# Altium PCB wch554e.PcbDoc
Units mm, origin at the board's own origin, x right, y up, seen from the top; angles counter-clockwise.
Board outline 19.85 x 16 mm, 2 copper layers (Top Layer, Bottom Layer), stack 0.95 mm thick; 19 components, 15 nets, 57 pads, 13 vias.
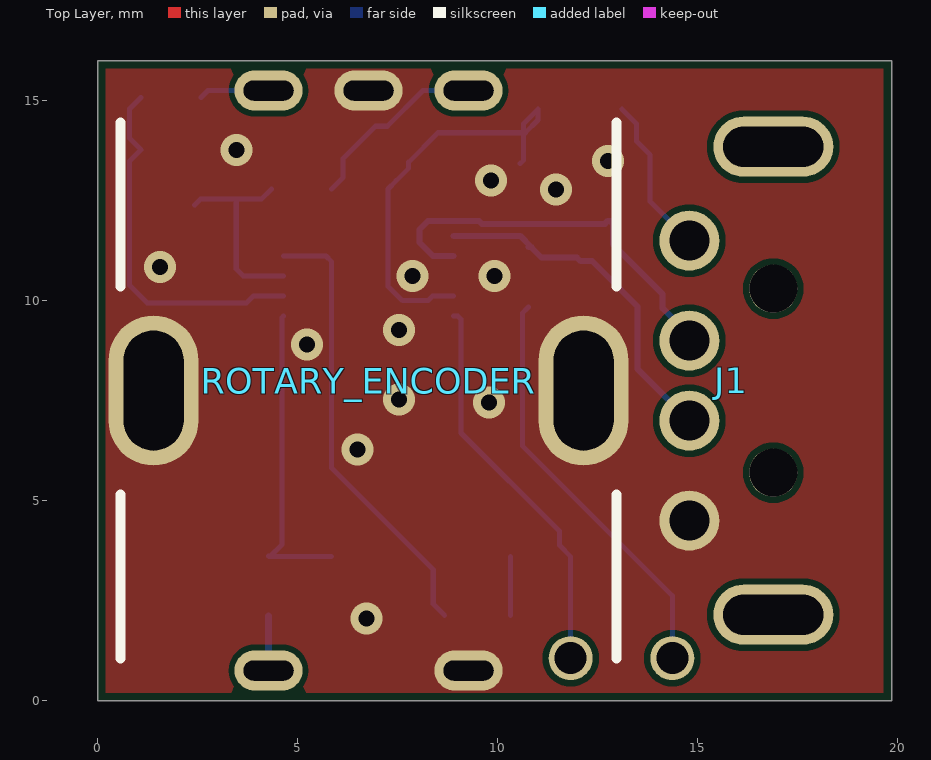
[diagram p0: Top Layer view]
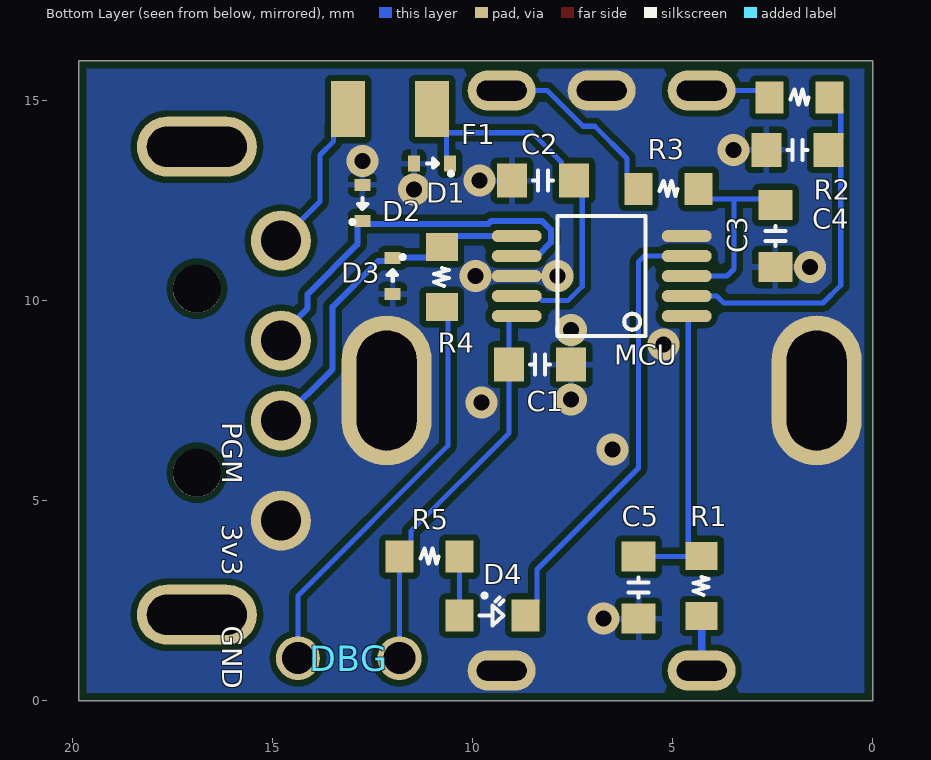
[diagram p1: Bottom Layer view, seen from below]

## Layer stack, top to bottom
Top Solder: solder mask 0.0254, SM-001, Dk 4
Top Layer: signal copper 0.035
Dielectric 1: core 0.88, Core-043, Dk 4.3
Bottom Layer: signal copper 0.035
Bottom Solder: solder mask 0.0254, SM-001, Dk 4

## Board outline
0,0 19.85,0 19.85,16 0,16

## Design rules (kind name [scope] priority, off if disabled: settings)
BoardOutlineClearance [All] p1: gap=0.2 ignorepadtopadclearanceinfootprint=FALSE
Clearance [All] p1: gap=0.152 ignorepadtopadclearanceinfootprint=FALSE
ComponentClearance [All] p1: gap=0.152 collisioncheckmode=3 verticalgap=0.254 showdistances=FALSE
DiffPairsRouting [All] p1: maxlimit=0.254 minlimit=0.152 mostfreqgap=0.152 toplayer_minwidth=0.152 toplayer_maxwidth=0.381 toplayer_prefwidth=0.152 bottomlayer_minwidth=0.152 bottomlayer_maxwidth=0.381 bottomlayer_prefwidth=0.152 maxuncoupledlength=12.7
Height [All] p1: minheight=0 maxheight=1000 prefheight=12.7
HoleSize [All] p1: absolutevalues=TRUE maxlimit=3.5 minlimit=0.4 maxpercent=80.000 minpercent=20.000
MatchedLengths USB_MatchedLengths [InDifferentialPair('USB_D')] p1: tolerance=25.4 checknetsindiffpair=TRUE checkdiffpairvsdiffpair=FALSE checkxsignals=FALSE checkothers=FALSE usedelayunits=TRUE delaytolerance=100.000000
MinimumSolderMaskSliver [All] p1: minsoldermaskwidth=0.1
PolygonConnect PolygonConnect_GNDs [(InNet('GND')) AND (IsVia OR (AsMM(PadXSize_AllLayers) >= 1) OR (AsMM(PadYSize_AllLayers) >= 1))] p1: connectstyle=Direct reliefconductorwidth=0.254 reliefentries=4 polygonreliefangle="90 Angle" airgapwidth=0.254
PolygonConnect [All] p2: connectstyle=Relief reliefconductorwidth=0.152 reliefentries=4 polygonreliefangle="90 Angle" airgapwidth=0.152
RoutingVias [All] p1: holewidth=0.711 width=1.27 viastyle="Through Hole" minholewidth=0.711 minwidth=1.27 maxholewidth=0.711 maxwidth=1.27 useviatemplates=TRUE viatemplateguid#1={9694B27E-8AEF-4735-89BC-3D34E5977D51} viatemplateguid#2={9DD44C69-4C71-40C9-9707-38A68C69CC0B} viatemplatename#1=GND_VIA viatemplatename#2=routing_via
SilkToSilkClearance [False] p1: silktosilkclearance=0.254
SilkToSolderMaskClearance [False] p1: minsilkscreentomaskgap=0.254 clearancetoexposedcopper=TRUE
SolderMaskExpansion [All] p1: expansion=0.05 istentingtop=FALSE
Width [All] p1: maxlimit=2.54 minlimit=0.127 preferedwidth=0.254 toplayer_prefwidth=0.127 minimp=50.000000 maximp=50.000000 favimp=50.000000
23 further rules are at their usual default settings.

## Classes and differential pairs
differential pair USB_D: +USB_D_P -USB_D_N

## Components (designator, comment, footprint, x,y, rotation, side; value= is the part's Value field where it differs from the comment)
C1 "1uF" MLCC_0603 8.308,8.403 r0 bottom
C2 "1uF" MLCC_0603 8.237,13.001 r180 bottom
C3 "10nF" MLCC_0603 2.427,11.617 r90 bottom
C4 "10nF" MLCC_0603 1.88,13.772 r180 bottom
C5 "10nF" MLCC_0603 5.849,2.826 r90 bottom
D1 "TVS_DIODE" TVS_DIODE 11.013,13.428 r0 bottom
D2 "TVS_DIODE" TVS_DIODE 12.755,12.444 r90 bottom
D3 "TVS_DIODE" TVS_DIODE 11.995,10.617 r270 bottom
D4 "=Value" SMT_LED_0603 9.5,2.129 r180 bottom
DBG "CON4" CON4 14.365,1.062 r180 bottom
F1 "1A" FUSE_0805 12.059,14.789 r180 bottom
J1 "USB_A_PLUG" USB_A 19.79,8 r90 top
MCU "CH554E" MSOP10 6.77,10.617 r0 bottom
R1 "120r" SMT_RES_0603 4.27,2.867 r90 bottom
R2 "120r" SMT_RES_0603 1.83,15.077 r180 bottom
R3 "120r" SMT_RES_0603 5.099,12.796 r180 bottom
R4 "10k" SMT_RES_0603 10.768,10.591 r90 bottom
R5 "680r" SMT_RES_0603 11.075,3.601 r180 bottom
ROTARY_ENCODER "ROTARY_ENCODER" ENCODER 6.77,7.755 r180 top

## Footprints (in the part's own frame and the unit in brackets; to place one, negate y for a bottom-side part, rotate by r counter-clockwise, add the part's x,y. Pads: shape width x height; smd on the part's side, far side on the other; paste and mask are expansions set on the pad)
CON4 [mm] "Debug header"
  rrect100% 1.1x1.1 hole 0.8: 1(0,0) 2(2.54,0)
ENCODER [mm] "Rotary encoder"
  oval 1.7x1 hole 0.5 slot 1.25 at 0 deg: 1(-2.5,-7.5) 2(0,-7.5) 3(2.5,-7.5) 4(-2.5,7) 5(2.5,7)
  rrect100% 2.25x3.75 hole 1.5 slot 3 at 90 deg: 2(-5.375,0)
  oval 2.25x3.75 hole 1.5 slot 3 at 90 deg: 2(5.375,0)
  silkscreen extent -6.2,-6.7 6.2,6.7, body extent -6.16,-7.75 6.14,7.25, height 21.4
FUSE_0805 [mm] "FUSE_0805"
  rrect1% 0.85x1.4 smd: 1(-1.05,0) 2(1.05,0)
MLCC_0603 [mm] "MLCC 0603"
  rrect1% 0.75x0.85 smd: 1(-0.775,0) 2(0.775,0)
  silkscreen extent -0.25,-0.25 0.25,0.25, body extent -0.85,-0.45 0.85,0.45, height 0.7
MSOP10 [mm] "MSOP10 3x3 x 0.5"
  oval 1.25x0.3 smd: 1(-2.125,1) 2(-2.125,0.5) 3(-2.125,0) 4(-2.125,-0.5) 5(-2.125,-1) 6(2.125,-1) 7(2.125,-0.5) 8(2.125,0) 9(2.125,0.5) 10(2.125,1)
  silkscreen extent -1.1,-1.5 1.1,1.5, body extent -2.3,-1.5 2.3,1.5, height 1
SMT_LED_0603 [mm] "SMT LED 0603"
  rrect1% 0.7x0.8 smd: 1(-0.825,0) 2(0.825,0)
  silkscreen extent -0.33,-0.25 0.28,0.55, body extent -0.8,-0.4 0.8,0.4, height 0.8
SMT_RES_0603 [mm] "0603 SMT Resistor"
  rrect1% 0.7x0.8 smd: 1(-0.75,0) 2(0.75,0)
  silkscreen extent -0.22,-0.17 0.23,0.2, body extent -0.85,-0.45 0.85,0.45, height 0.5
TVS_DIODE [mm] "SODFL 98x40 2 pin"
  rrect1% 0.3x0.4 smd: 1(-0.45,0) 2(0.45,0)
  silkscreen extent -0.52,-0.13 0.13,0.3, body extent -0.49,-0.33 0.49,0.33, height 0.4
USB_A [mm] "USB A Plug"
  round 1.5 hole 1: 1(3.5,5) 2(1,5) 3(-1,5) 4(-3.5,5)
  round 1.2 hole 1.2 unplated: B(-2.3,2.9) B(2.3,2.9)
  oval 1.5x3 hole 1 slot 2.5 at 90 deg: M(-5.85,2.9) M(5.85,2.9)
  body extent -6.3,-14.9 6.3,5.1, height 3.4

## Part data
C1 C2: library part CAP_CERAMIC, "MLCC", Supplier Part No. 1=C105524
C3 C4 C5: library part CAP_CERAMIC, "MLCC", Supplier Part No. 1=C519509
D1 D2 D3: "TVS Diode", Supplier Part No. 1=C384848
D4: library part LED, "LED", Supplier Part No. 1=C434424
DBG: "Debug header"
F1: library part FUSE, "FUSE", Supplier Part No. 1=C70061
MCU: Supplier Part No. 1=C111293
R1 R2 R3: library part RESISTOR, "Resistor", Supplier Part No. 1=C22787
R4: library part RESISTOR, "Resistor", Supplier Part No. 1=C25804
R5: library part RESISTOR, "Resistor", Supplier Part No. 1=C23228
ROTARY_ENCODER: "Rotary Encoder"

## Via types
v1: diameter 0.8, hole 0.4, Top Layer to Bottom Layer, tented both sides, 13 vias

## Nets (pads, with @x,y where several pads share a name; then routed paths per layer and width w, separated by ;. In a path a pad name is that pad's centre, name@x,y a point inside that pad or via, vN(x,y) a via of type N, cw(c..) or ccw(c..) an arc to the next point about the centre after c; other vN are vias at no path point)
3v3: C1.2 DBG.2 MCU.10 R5.1 | length 9.8
  Bottom Layer w0.127: MCU.10 9.003,9.617 9.083,9.537 C1.2 9.083,6.695 11.542,4.236 11.542,3.884 R5.1 ; DBG.2 R5.1
BUTTON: C5.2 MCU.1 R1.2 | length 7.7
  Bottom Layer w0.127: R1.2 4.286,3.601 C5.2 ; R1.2@4.32,3.617 4.606,3.902 4.606,9.577 MCU.1
CHA: C4.2 MCU.2 R2.2 | length 9.2
  Bottom Layer w0.127: R2.2 0.793,14.791 0.793,14.058 1.08,13.772 0.793,13.485 0.793,10.387 1.238,9.942 3.717,9.942 3.891,10.117 MCU.2
CHB: C3.2 MCU.3 R3.2 | length 5.1
  Bottom Layer w0.127: C3.2 2.573,12.538 3.463,12.538 ; R3.2 4.092,12.538 3.463,12.538 ; MCU.3 3.64,10.617 3.463,10.793 3.463,12.538
GND: C1.1 C2.1 C3.1 C4.1 C5.1 D1.2 D2.2 D3.2 J1.4 MCU.5 MCU.8 ROTARY_ENCODER.2 ROTARY_ENCODER.4
  other v1: 6.719,2.051 6.497,6.286 9.778,7.455 7.533,7.536 5.231,8.902 7.533,9.27 7.873,10.617 9.921,10.617 1.558,10.842 11.463,12.783 9.831,13.001 12.755,13.488 3.473,13.772
LED_A: D4.1 R5.2 | length 1.5
  Bottom Layer w0.127: D4.1 R5.2
LED_C: D4.2 MCU.4 | length 11.3
  Bottom Layer w0.127: MCU.4 5.709,11.117 5.849,10.976 5.849,5.817 8.388,3.278 8.388,2.415 D4.2
PGM: DBG.1 R4.1 | length 10.4
  Bottom Layer w0.127: R4.1 10.617,9.689 10.617,6.375 14.365,2.626 DBG.1
RTA: R2.1 ROTARY_ENCODER.3 | length 1.8
  Bottom Layer w0.127: R2.1 2.757,15.255 ROTARY_ENCODER.3
RTB: R3.1 ROTARY_ENCODER.1 | length 4.7
  Bottom Layer w0.127: R3.1 6.136,13.082 6.136,13.554 6.943,14.361 7.239,14.361 8.133,15.255 ROTARY_ENCODER.1
SWB: R1.1 ROTARY_ENCODER.5 | length 1.4
  Bottom Layer w0.178: ROTARY_ENCODER.5 R1.1
USB_D_N: D2.1 J1.2 MCU.7 | length 10
  Bottom Layer w0.152: MCU.7 8.385,11.117 8.042,11.46 8.042,11.774 8.264,11.995 9.527,11.995 9.603,11.92 12.681,11.92 D2.1 ; D2.1 12.805,11.994 12.879,11.92 12.879,11.407 14.124,10.162 14.124,9.809 14.79,9.143 J1.2
USB_D_P: D3.1 J1.3 MCU.6 R4.2 | length 8.8
  Bottom Layer w0.152: MCU.6 8.897,11.615 10.571,11.615 R4.2@10.844,11.341 ; R4.2 R4.2@10.844,11.341 ; J1.3 13.499,8.291 13.499,9.854 12.36,10.993 12.068,10.993 11.981,11.081 11.092,11.081 10.844,11.328 R4.2@10.844,11.341
VIN: F1.1 J1.1 | length 4
  Bottom Layer w0.127: F1.1 13.47,14.427 13.47,13.984 13.811,13.644 13.811,12.479 J1.1
VUSB: C2.2 D1.1 F1.2 MCU.9 | length 10.6
  Bottom Layer w0.127: MCU.9 8.375,10.117 8.26,10.001 7.618,10.001 7.257,10.362 7.257,12.796 C2.2 7.773,13.312 7.773,13.463 8.509,14.198 10.689,14.198 11.009,14.518 F1.2 10.649,14.429 10.649,13.513 D1.1
pads on no net: J1.B J1.M

## Polygon pours and split planes (outlines as drawn)
GND on Bottom Layer "GND_BOTTOM" (solid, remove dead copper, pour order 0): 0,16 19.85,16 19.85,0 0,0
GND on Top Layer "GND_TOP" (solid, remove dead copper, pour order 1): 0,16 19.642,16 19.642,0 0,0

## Silkscreen, mask and mechanical layers (free items; w line width, h text height)
Bottom Overlay:
  text "PGM" at 16.263,6.957 h0.5 r90
  text "3v3" at 16.263,4.417 h0.5 r90
  text "GND" at 16.263,1.877 h0.5 r90
Board:
  the board outline again, w0.102

## Dimensions
19.85,16 to 0,16 on Dimensions
19.85,16 to 19.85,0 on Dimensions